# Altium PCB Jumper.PcbDoc (part 1 of 2)
Units mil, origin at the board's own origin, x right, y up, seen from the top; angles counter-clockwise.
Board outline 6325 x 3228 mil, 4 copper layers (Top Layer, GND, POWER, Bottom Layer), stack 61.145 mil thick; 115 components, 129 nets, 531 pads, 416 vias.
Unrouted connection lines stored in the file: 52.
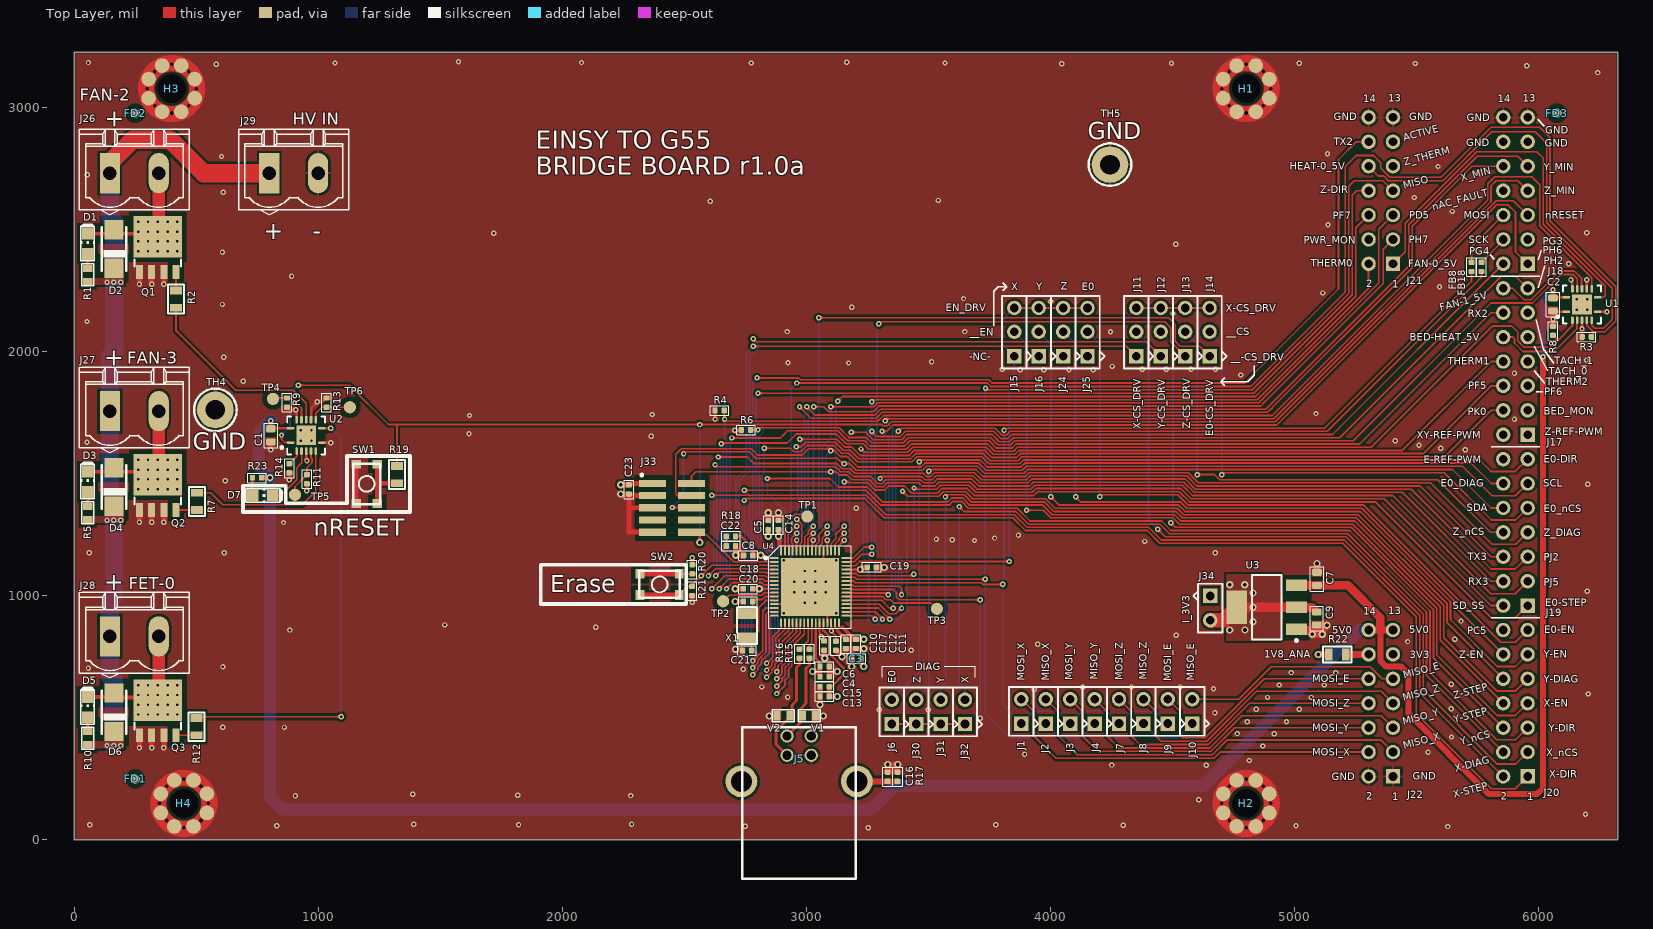
[diagram p0: Top Layer view]
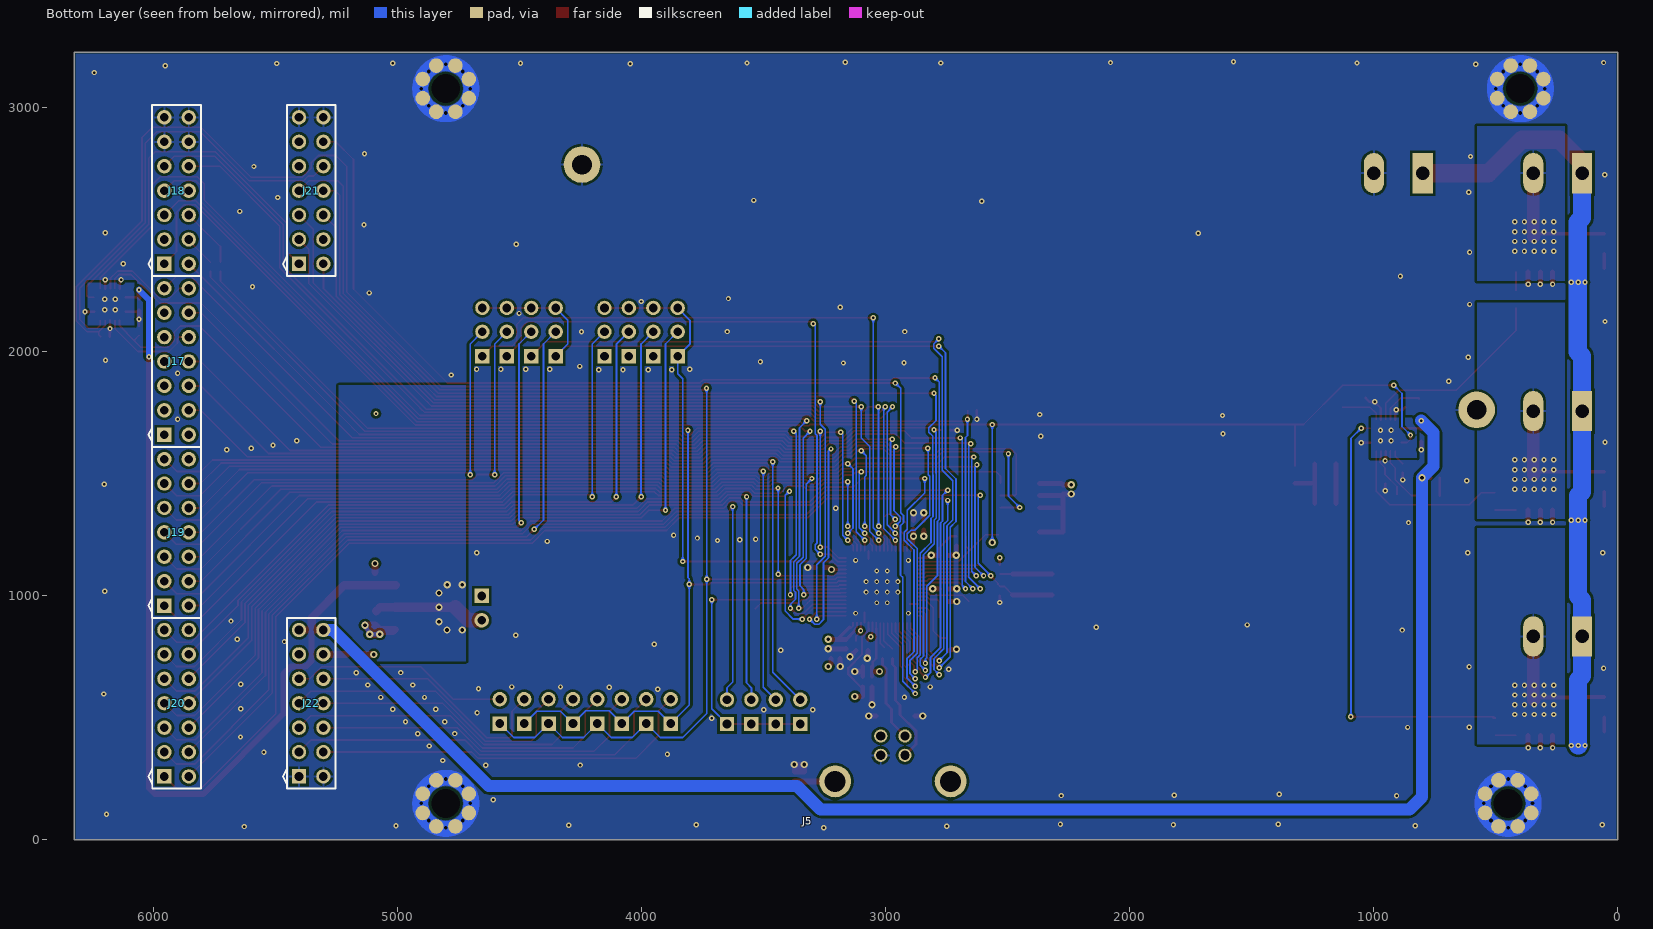
[diagram p1: Bottom Layer view, seen from below]
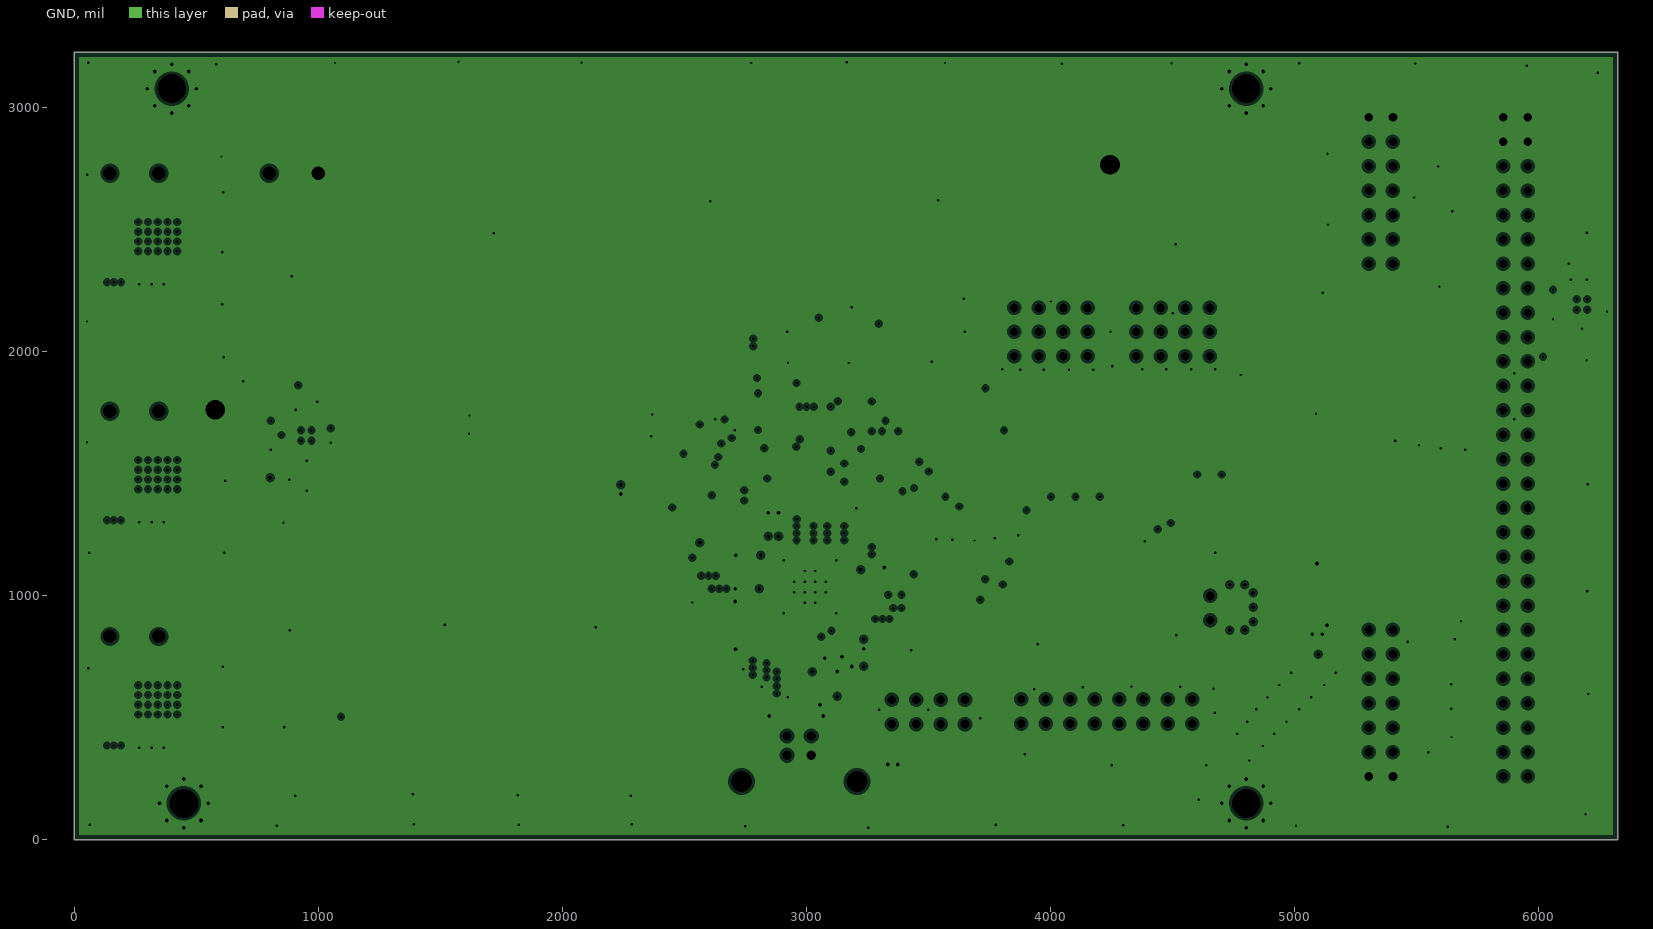
[diagram p2: GND, clearances drawn from the general rule]
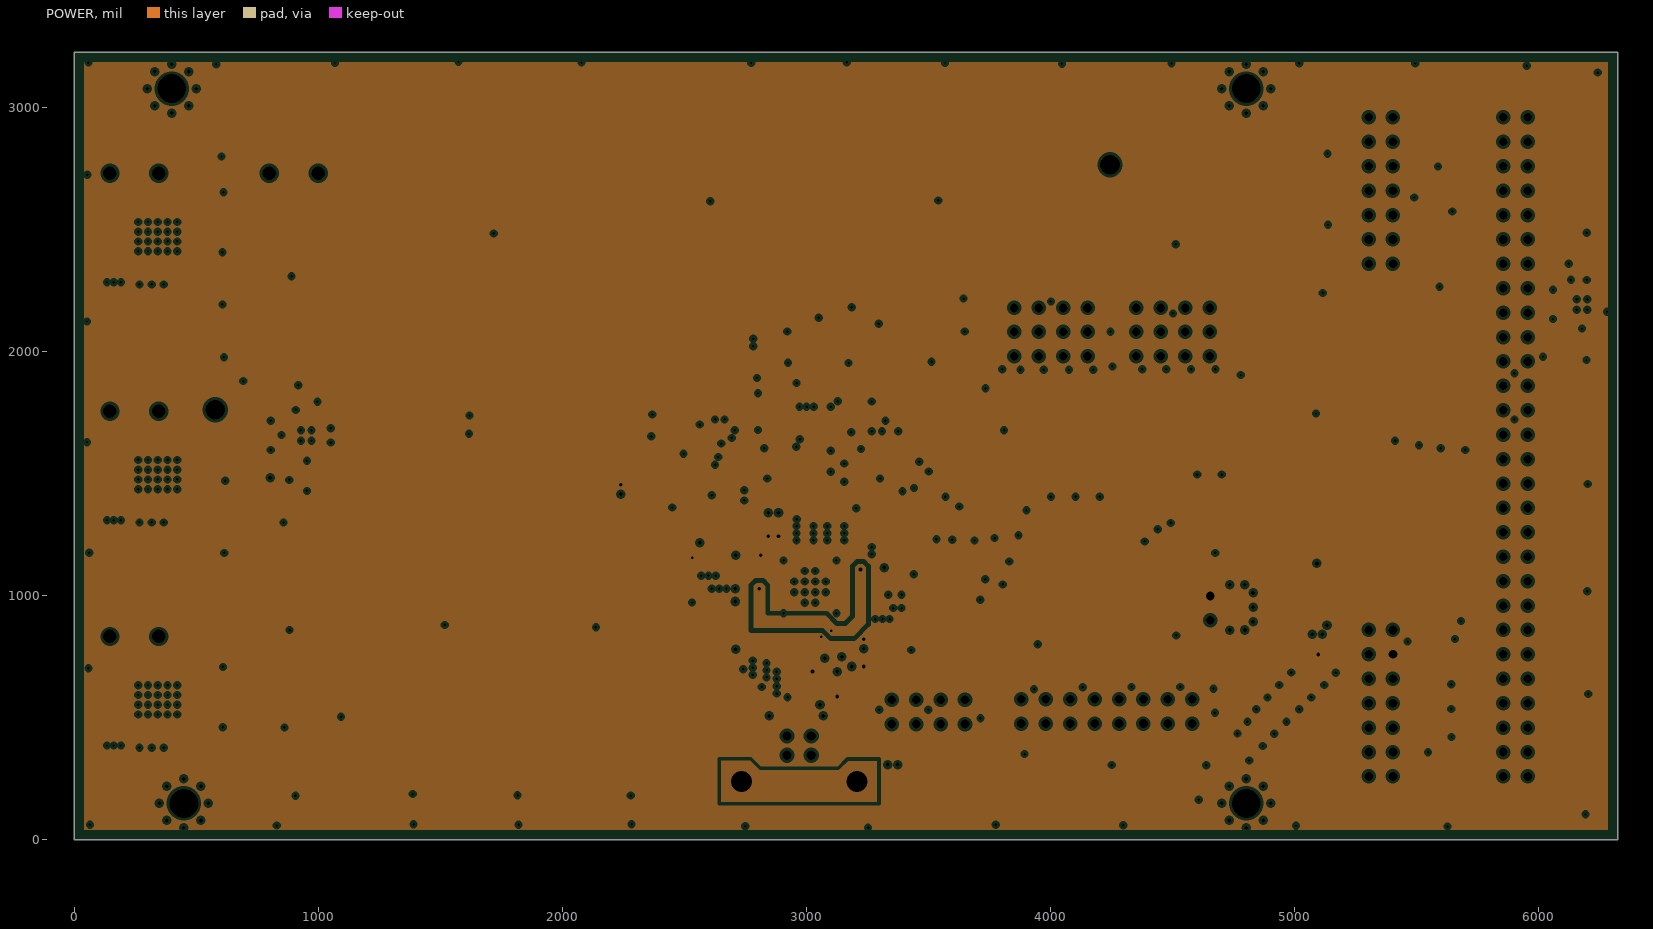
[diagram p3: POWER, clearances drawn from the general rule]

## Layer stack, top to bottom
Top Solder: solder mask 0.4, Solder Resist, Dk 3.5
Top Layer: signal copper 1.4
Dielectric 1: prepreg 7.48, Dk 4.2
GND: plane copper 1.417, net GND
Dielectric 3: core 40.551, Dk 4.2
POWER: plane copper 1.417, net 3V3
Dielectric 2: prepreg 7.48, Dk 4.2
Bottom Layer: signal copper 1.4
Bottom Solder: solder mask 0.4, Solder Resist, Dk 3.5

## Board outline
0,0 0,3228 6325,3228 6325,0

## Design rules (kind name [scope] priority, off if disabled: settings)
Clearance Fiducials [All] p1: gap=6 ignorepadtopadclearanceinfootprint=FALSE except(10: Arc-Poly Track-Poly THPad-Poly Via-Poly Fill-Poly Poly-Poly Poly-Region Poly-Hole; 20: SMDPad-Poly)
Clearance [All] p2: gap=6 ignorepadtopadclearanceinfootprint=FALSE except(10: Arc-Poly Track-Poly SMDPad-Poly THPad-Poly Via-Poly Fill-Poly Poly-Poly Poly-Region Poly-Hole)
ComponentClearance "Connector Interferance" [InComponentClass('Einsy Bot TH Conn') or InComponentClass('Top Jumpers') or InComponent('TH1')] p1: gap=-1 collisioncheckmode=3 verticalgap=100000 showdistances=FALSE
ComponentClearance [All] p2: gap=10 collisioncheckmode=3 verticalgap=10 showdistances=FALSE
HoleSize [All] p1: absolutevalues=TRUE maxlimit=250 minlimit=1 maxpercent=80.000 minpercent=20.000
MinimumSolderMaskSliver [All] p1: minsoldermaskwidth=3.8
PasteMaskExpansion [All] p1: expansion=-1
PlaneClearance [All] p1: clearance=12
PlaneConnect [All] p1: pad.planeconnectstyle=Relief pad.reliefexpansion=12 pad.reliefentries=4 pad.reliefconductorwidth=10 pad.reliefairgap=10 via.planeconnectstyle=Direct via.reliefexpansion=12 via.reliefentries=4 via.reliefconductorwidth=10 via.reliefairgap=10
PolygonConnect [All] p1: thpad.connectstyle=Relief thpad.reliefconductorwidth=10 thpad.reliefentries=4 thpad.polygonreliefangle="90 Angle" thpad.airgapwidth=10 smdpad.connectstyle=Direct smdpad.reliefconductorwidth=10 smdpad.reliefentries=4 smdpad.polygonreliefangle="90 Angle" smdpad.airgapwidth=10 via.connectstyle=Direct via.reliefconductorwidth=10 via.reliefentries=4 via.polygonreliefangle="90 Angle" via.airgapwidth=10
RoutingVias [All] p1: holewidth=10 width=22 viastyle="Through Hole" minholewidth=10 minwidth=22 maxholewidth=15 maxwidth=30
SilkToSilkClearance [All] p1 off: silktosilkclearance=10
SilkToSolderMaskClearance [IsPad] p1 off: minsilkscreentomaskgap=10 clearancetoexposedcopper=TRUE
SolderMaskExpansion "Via Barrel Relief" [IsVia] p1: expansion=1 soldermaskfromhole=TRUE
SolderMaskExpansion [All] p2: expansion=2
Width [All] p1: maxlimit=1000 minlimit=6 preferedwidth=8
22 further rules are at their usual default settings.

## Classes and differential pairs
component class Fiducials: FD1 FD2 FD3
component class "Large Connectors": J26 J27 J28 J29
component class "Einsy Bot TH Conn": J17 J18 J19 J20 J21 J22
component class "Bot Conn TH": J17 J18 J19 J20 J21 J22
component class "Top Jumpers": J1 J2 J3 J4 J6 J7 J8 J9 J10 J11 J12 J13 J14 J15 J16 J24 J25 J30 J31 J32

## Components (designator, comment, footprint, x,y, rotation, side; value= is the part's Value field where it differs from the comment)
C1 "100nF" C0603 806,1658 r90 top
C2 "100nF" C0603 6059,2194 r90 top
C3 "1uF" C0402#1 3205,743 r0 top
C4 "1uF" C0402#2 3075,669 r180 top
C5 "1uF" C0402#2 2844,1289.85 r90 top
C6 "100nF" C0402#2 3074.85,711 r0 top
C7 "4.7uF 6.3V 0603" C0603 5092,1070 r270 top value=4.7uF
C8 "100nF" C0402#2 2761.85,1166 r0 top
C9 "4.7uF 6.3V 0603" C0603 5091,907 r90 top value=4.7uF
C10 "100nF" C0402#2 3073,796.15 r90 top
C11 "100nF" C0402#2 3203.3,803.15 r90 top
C12 "100nF" C0402#2 3162,802.85 r90 top
C13 "1uF" C0402#2 3074.85,588 r0 top
C14 "100nF" C0402#2 2886,1290.15 r270 top
C15 "100nF" C0402#2 3075,628 r180 top
C16 "100nF" C0402#2 3333,259 r90 top
C17 "1uF" C0402#2 3121,795.85 r270 top
C18 "100nF" C0402#2 2760.85,1029 r0 top
C19 "100nF" C0402#2 3268.15,1117 r180 top
C20 "5.6pF" C0402#2 2761.15,977 r180 top
C21 "5.6pF" C0402#2 2757.15,776 r180 top
C22 "100nF" C0402#2 2691,1204 r0 top
C23 "100nF" C0402#2 2273,1436 r90 top
D1 "Red" LED2012120 56,2442 r90 top
D2 "SK310A-TP" SMA-SM 164,2421 r90 top value=-NA-
D3 "Red" LED2012120 56,1467 r90 top
D4 "SK310A-TP" SMA-SM 164,1446 r90 top value=-NA-
D5 "Red" LED2012120 56,544 r90 top
D6 "SK310A-TP" SMA-SM 164,523 r90 top value=-NA-
D7 "YEL" LED2012120 772,1411 r0 top
FB8 "120R" R0402 5725,2348 r270 top value=120Rfb
FB18 "120R" R0402 5766,2348 r270 top value=120Rfb
FD1 "FIDUCIAL" FIDUCIAL-1X2 250,250 r0 top
FD2 "FIDUCIAL" FIDUCIAL-1X2 250,2978 r0 top
FD3 "FIDUCIAL" FIDUCIAL-1X2 6075,2978 r0 top
H1 "Hole_DS" Wave_hole_3x7-doubleSided 4802,3078 r0 top
H2 "Hole_DS" Wave_hole_3x7-doubleSided 4802,150 r0 top
H3 "Hole_DS" Wave_hole_3x7-doubleSided 400,3078 r0 top
H4 "Hole_DS" Wave_hole_3x7-doubleSided 450,150 r0 top
J1 "Header 2x1" HDR2X1 3881,527.79 r90 top value=JMP
J2 "Header 2x1" HDR2X1 3981,527.79 r90 top value=JMP
J3 "Header 2x1" HDR2X1 4081,527.79 r90 top value=JMP
J4 "Header 2x1" HDR2X1 4181,527.79 r90 top value=JMP
J5 "USB-B TH R/A" PN61729_ALT 2970.22,240 r0 top locked value=USB-B
J6 "Header 2x1" HDR2X1 3350,525.79 r90 top value=JMP
J7 "Header 2x1" HDR2X1 4281,527.79 r90 top value=JMP
J8 "Header 2x1" HDR2X1 4381,527.79 r90 top value=JMP
J9 "Header 2x1" HDR2X1 4481,527.79 r90 top value=JMP
J10 "Header 2x1" HDR2X1 4581,527.79 r90 top value=JMP
J11 "Header 3x1" HDR3X1 4352,2082 r90 top value=JMP
J12 "Header 3x1" HDR3X1 4452,2082 r90 top value=JMP
J13 "Header 3x1" HDR3X1 4552,2082 r90 top value=JMP
J14 "Header 3x1" HDR3X1 4652,2082 r90 top value=JMP
J15 "Header 3x1" HDR3X1 3852,2082 r90 top value=JMP
J16 "Header 3x1" HDR3X1 3952,2082 r90 top value=JMP
J17 "HDR" HDR2X7_ALT_PINOUT 5904.95,1960.28 r90 bottom locked
J18 "HDR" HDR2X7_ALT_PINOUT 5904.95,2660.28 r90 bottom locked
J19 "HDR" HDR2X7_ALT_PINOUT 5904.95,1260.28 r90 bottom locked
J20 "HDR" HDR2X7_ALT_PINOUT 5904.76,560.28 r90 bottom locked
J21 "HDR" HDR2X7_ALT_PINOUT 5353.38,2660.28 r90 bottom locked
J22 "HDR" HDR2X7_ALT_PINOUT 5353.38,560.28 r90 bottom locked
J24 "Header 3x1" HDR3X1 4052,2082 r90 top value=JMP
J25 "Header 3x1" HDR3X1 4152,2082 r90 top value=JMP
J26 "0395311002" MSTBV2 247,2732 r0 top locked
J27 "0395311002" MSTBV2 247,1757 r0 top locked
J28 "0395311002" MSTBV2 247,834 r0 top locked
J29 "0395311002" MSTBV2 900,2732 r0 top locked
J30 "Header 2x1" HDR2X1 3450,525.79 r90 top value=JMP
J31 "Header 2x1" HDR2X1 3550,525.79 r90 top value=JMP
J32 "Header 2x1" HDR2X1 3650,525.79 r90 top value=JMP
J33 "0.05in 2-Row" FTSH-105-XX-X-DV 2450,1361 r90 top value=HDR10
J34 "Header 2x1" HDR2X1 4655,949 r270 top value=JMP
Q1 "PSMN1R8-40YLC" SOT669 343,2427 r0 top value=N-FET
Q2 "PSMN1R8-40YLC" SOT669 343,1452 r0 top value=N-FET
Q3 "PSMN1R8-40YLC" SOT669 343,529 r0 top value=N-FET
R1 "1.8K" R0603 56,2315 r270 top
R2 "22R" R0805 418,2216 r90 top
R3 "100K" R0402 6197,2061 r180 top
R4 "100K" R0402 2645,1760 r180 top
R5 "1.8K" R0603 56,1340 r270 top
R6 "100K" R0402 2753,1680 r180 top
R7 "22R" R0805 504,1387 r270 top
R8 "100K" R0402 6059,2086 r90 top
R9 "100K" R0402 872,1792 r270 top
R10 "1.8K" R0603 56,417 r270 top
R11 "100K" R0402 954,1478 r270 top
R12 "22R" R0805 502,464 r270 top
R13 "100K" R0402 1034,1791.9 r90 top
R14 "100K" R0402 882,1523 r270 top
R15 "0R" R0402 3013,763 r90 top
R16 "0R" R0402 2972,763 r90 top
R17 "1M" R0402 3374,259 r270 top
R18 "100K" R0402 2691,1244 r0 top
R19 "22R" R0805 1323,1497 r90 top
R20 "1K" R0402 2533,1109 r90 top
R21 "10K" R0402 2532,1020 r270 top
R22 "0R0" R0805 5175,760 r0 top
R23 "1K" R0402 750,1484 r180 top
SW1 "KMR741NG ULC LFS" "KMR 6 Series" 1199,1459 r90 top value=-NA-
SW2 "KMR741NG ULC LFS" "KMR 6 Series" 2399,1047 r0 top value=-NA-
TH4 "TH" TP_80_150 574,1962 r0 top
TH5 "TH" TP_80_150 4239,2967 r0 top
TP1 "#NAME?" TP-2 3004,1325 r90 top
TP2 "#NAME?" TP-2 2659,978 r90 top
TP3 "#NAME?" TP-2 3535,947 r90 top
TP4 "#NAME?" TP-2 815,1807 r90 top
TP5 "#NAME?" TP-2 905,1414 r90 top
TP6 "#NAME?" TP-2 1130,1773 r90 top
U1 "SN74AHCT125RGYR" QFN50P350X350X100_RGY_S-PVQFN-N14 6177.8,2193.53 r0 top locked value="Tri-State Buffer"
U2 "SN74AHCT125RGYR" QFN50P350X350X100_RGY_S-PVQFN-N14 951.2,1657.53 r0 top locked value="Tri-State Buffer"
U3 "3.3V 1A SOT223" SOT223_AZ1117 4886,953 r180 top value="3.3V LDO"
U4 "ATSAMG55J19A-MUT" QFN64_7.5x7.5mm 3015,1037 r0 top locked value=-NA-
V1 "5V" R0603 3011.75,508 r0 top
V2 "5V" R0603 2906,508 r180 top
X1 "32.768kHz" XTAL_32X15_2 2757,876.79 r270 top

## Footprints (in the part's own frame and the unit in brackets; to place one, negate y for a bottom-side part, rotate by r counter-clockwise, add the part's x,y. Pads: shape width x height; smd on the part's side, far side on the other; paste and mask are expansions set on the pad)
C0402#1 [mil]
  rrect40% 22x24 smd: 1(-18.7,0) 2(19,0)
  silkscreen extent -38,-19 38,20, body extent -20,-10 20,10, height 20
C0402#2 [mil]
  rrect40% 22x24 smd: 1(18.85,0) 2(-18.85,0)
  silkscreen extent -38,-20 38,19, body extent -20,-10 20,10, height 20
C0603 [mm]
  rrect40% 0.74x1 smd: 1(-0.68,0) 2(0.68,0)
  silkscreen extent -1.28,-0.7 1.28,0.7, body extent -0.8,-0.4 0.8,0.4, height 0.8
FIDUCIAL-1X2 [mil]
  rrect100% 40x40 smd paste-3897.64 mask+20: F(0,0)
  body extent -20,-20 20,20, height 1
FTSH-105-XX-X-DV [mm] "1.27mm pitch, 10 pin, terminal strip; vertical, SMT"
  rect 0.75x2.8 smd: 1(2.54,2.03) 2(2.54,-2.03) 3(1.27,2.03) 4(1.27,-2.03) 5(0,2.03) 6(0,-2.03) 7(-1.27,2.03) 8(-1.27,-2.03) 9(-2.54,2.03) 10(-2.54,-2.03)
  silkscreen extent 3.28,3.03 3.52,3.27
HDR2X1 [mm] "Connector; Header; 2X1 Position"
  rect 1.5x1.5 hole 0.9: 1(-1.29,0)
  round 1.5 hole 0.9: 2(1.25,0)
  silkscreen extent -2.56,-1.78 2.5,1.27, body extent -2.56,-1.27 2.5,1.27, height 6.35
HDR2X7_ALT_PINOUT [mm] "Connector; Header; 5x2 Position"
  rect 1.5x1.5 hole 0.9: 1(-7.62,1.27)
  round 1.5 hole 0.9: 2(-7.62,-1.27) 3(-5.08,1.27) 4(-5.08,-1.27) 5(-2.54,1.27) 6(-2.54,-1.27) 7(0,1.27) 8(0,-1.27) 9(2.54,1.27) 10(2.54,-1.27) 11(5.08,1.27) 12(5.08,-1.27) 13(7.62,1.27) 14(7.62,-1.27)
  silkscreen extent -8.89,-2.54 8.89,2.92, body extent -8.99,-2.64 8.99,2.64, height 6.35
HDR3X1 [mm] "Connector; Header; 2X1 Position"
  rect 1.5x1.5 hole 0.9: 1(-2.54,0)
  round 1.5 hole 0.9: 2(0,0) 3(2.48,0)
  silkscreen extent -3.81,-1.78 3.73,1.27, body extent -3.81,-1.27 3.73,1.27, height 6.35
"KMR 6 Series" [mm] "Tactile Switch SPST-NO Top Actuated Surface Mount"
  rect 0.9x1 smd: 1(-2.05,1.1) 2(2.05,1.1) 3(-2.05,-1.1) 4(2.05,-1.1)
  silkscreen extent -2.1,-1.4 2.1,1.4, body extent -2.1,-1.4 2.1,1.4, height 1.9
LED2012120 [mil]
  rect 48x48 smd: A(-41.34,0) C(42,0)
  silkscreen extent -69,-28 81,28, body extent -50,-25 50,25, height 28
MSTBV2 [mil]
  rect 82.5x165 hole 55: 1(-100,0)
  oval 82.5x165 hole 55: 2(100,0)
  silkscreen extent -225,-170 225,180, body extent -228,-153 228,183, height 394
PN61729_ALT [mil]
  round 54 hole 38: 1(50,186) 2(-49.21,186) 3(-49.21,107) 4(50,107)
  round 130.5 hole 87: 5(-236.22,0) 6(237,0)
  silkscreen extent -232,-400 233,221, body extent -237,-405 238,226, height 406
QFN50P350X350X100_RGY_S-PVQFN-N14 [mm] "QFN, 14-Leads, Body 3.50x3.50mm, Pitch 1.50mm/0.50mm, Thermal Pad 2.05x2.05mm, IPC High Density"
  oval 0.8x0.28 smd: 1(-1.631,-0.75) 7(1.631,-0.75) 8(1.631,0.75) 14(-1.631,0.75)
  oval 0.28x0.8 smd: 2(-1,-1.631) 3(-0.5,-1.631) 4(0,-1.631) 5(0.5,-1.631) 6(1,-1.631) 9(1,1.631) 10(0.5,1.631) 11(0,1.631) 12(-0.5,1.631) 13(-1,1.631)
  rect 2.05x2.05 smd paste-1.143: 15(0,0)
  silkscreen extent -2.66,-1.97 1.97,1.97, body extent -1.83,-1.83 1.83,1.83, height 1
QFN64_7.5x7.5mm [mm]
  oval 0.9x0.2 smd paste-0.025 mask+0.051: 1(-3.725,3) 2(-3.725,2.6) 3(-3.725,2.2) 4(-3.725,1.8) 5(-3.725,1.4) 6(-3.725,1) 7(-3.725,0.6) 8(-3.725,0.2) 9(-3.725,-0.2) 10(-3.725,-0.6) 11(-3.725,-1) 12(-3.725,-1.4) 13(-3.725,-1.8) 14(-3.725,-2.2) 15(-3.725,-2.6) 16(-3.725,-3) 33(3.725,-3) 34(3.725,-2.6) 35(3.725,-2.2) 36(3.725,-1.8) 37(3.725,-1.4) 38(3.725,-1) 39(3.725,-0.6) 40(3.725,-0.2) 41(3.725,0.2) 42(3.725,0.6) 43(3.725,1) 44(3.725,1.4) 45(3.725,1.8) 46(3.725,2.2) 47(3.725,2.6) 48(3.725,3)
  oval 0.2x0.9 smd paste-0.025 mask+0.051: 17(-3,-3.725) 18(-2.6,-3.725) 19(-2.2,-3.725) 20(-1.8,-3.725) 21(-1.4,-3.725) 22(-1,-3.725) 23(-0.6,-3.725) 24(-0.2,-3.725) 25(0.2,-3.725) 26(0.6,-3.725) 27(1,-3.725) 28(1.4,-3.725) 29(1.8,-3.725) 30(2.2,-3.725) 31(2.6,-3.725) 32(3,-3.725) 49(3,3.725) 50(2.6,3.725) 51(2.2,3.725) 52(1.8,3.725) 53(1.4,3.725) 54(1,3.725) 55(0.6,3.725) 56(0.2,3.725) 57(-0.2,3.725) 58(-0.6,3.725) 59(-1,3.725) 60(-1.4,3.725) 61(-1.8,3.725) 62(-2.2,3.725) 63(-2.6,3.725) 64(-3,3.725)
  rect 6.02x6.02 smd paste-3.175 mask+0.051: 65(0,0)
  silkscreen extent -4.74,-4.29 4.29,4.29, body extent -3.75,-3.75 3.75,3.75, height 0.9
R0402 [mil]
  rrect40% 22x24 smd: 1(-18.9,0) 2(19,0)
  silkscreen extent -38,-19 38,20, body extent -20,-10 20,10, height 14
R0603 [mil]
  rect 29x39 smd: 1(-26.75,0) 2(26.75,0)
  silkscreen extent -45,-25 45,25, body extent -34,-19 34,19, height 22
R0805 [mm]
  rect 0.8x1.25 smd mask+0.051: 1(-0.9,0) 2(0.9,0)
  silkscreen extent -1.5,-0.82 1.5,0.82, body extent -1.05,-0.67 1.05,0.67, height 0.6
SMA-SM [mil]
  rect 79x79 smd: A(79,0) K(-78.74,0)
  round 25 on Top Overlay: ""(-107.28,56.1)
  silkscreen extent -89,-49 89,50, body extent -105,-54 105,55, height 116
SOT223_AZ1117 [mm] "Made for Diodes Inc AZ1117 Vreg"
  rect 2.15x1.2 smd: 1(-3.1,2.3) 2(-3.1,0) 3(-3.1,-2.3)
  rect 2.15x3.5 smd: TAB(3.1,0)
  silkscreen extent -3.22,-3.35 1.55,3.57, body extent -3.5,-3.35 3.5,3.35, height 1.8
SOT669 [mm]
  rect 0.711x1.422 smd: 1(-1.905,-2.55) 2(-0.635,-2.55) 3(0.635,-2.55) 4(1.905,-2.55)
  rect 5.004x4.318 smd paste-2.6: TAB(0,1.118)
  rect 2.26x1.91 on Top Paste: ""(-1.351,-0.036) ""(-1.351,2.315) ""(1.351,-0.037) ""(1.351,2.314)
  silkscreen extent -2.4,-1.95 2.41,-1.22, body extent -2.44,-3.05 2.46,3.25, height 1.1
TP-2 [mil]
  round 50 smd paste-78.74: 1(0,0)
  body extent -25,-25 25,25, height 1
TP_80_150 [mil]
  round 150 hole 80: 1(5,-200)
  silkscreen extent -82,-287 92,-113
Wave_hole_3x7-doubleSided [mil]
  round 0 hole 15 paste-20 mask-20: 1(-100,0) 1(-70,-70) 1(-70,70) 1(0,-100) 1(0,100) 1(70,-70) 1(70,70) 1(100,0)
  round 60 smd paste-5 mask+0: 1(-94.49,-39.37) 1(-94.49,39.37) 1(-39.37,-94.49) 1(-39.37,94.49) 1(39.37,-94.49) 1(39.37,94.49) 1(94.49,-39.37) 1(94.49,39.37)
  round 60 smd far side paste-5 mask+0: 1(-94.49,-39.37) 1(-94.49,39.37) 1(-39.37,-94.49) 1(-39.37,94.49) 1(39.37,-94.49) 1(39.37,94.49) 1(94.49,-39.37) 1(94.49,39.37)
  round 0 hole 118.11 unplated paste+0 mask-112: ""(0,0)
  Top Layer lines w64.96: -74.25,-74.25 cw(c0,0) 105,0 cw(c0,0) 19.9,-103.1 cw(c0,0) -74.25,-74.25
  Bottom Layer lines w64.96: -74.25,74.25 cw(c0,0) 105,0 cw(c0,0) 74.25,-74.25 cw(c0,0) -74.25,74.25
  body extent -105,-105 105,105
XTAL_32X15_2 [mm]
  rect 1.1x1.9 smd: 1(-1.25,0) 2(1.25,0)
  silkscreen extent -1.9,-1.05 1.9,1.05, body extent -1.6,-0.75 1.6,0.75, height 0.9

## Part data
C1 C2: library part "100nF 0603 50V X7R", "CAP CER 0603 100nF 50V 10% X7R", Manufacturer=Kemet, MANUFACTURER #=C0603C104K5RACTU, TOLERANCE=10%, DISTRIBUTOR=Digikey, DISTRIBUTOR #=399-5089-2-ND, EE_SPEC=50V, PART="100nF 50V X7R 0603", PART DESCRIPTION="0.10µF ±10% 50V Ceramic Capacitor X7R 0603 (1608 Metric)"
C3 C4 C5 C13 C17: library part "1uF 0402 6.3V X5R", "CAP CER 0402 1uF 6.3V 10% X5R", Manufacturer=Murata, MANUFACTURER #=GRM155R60J105KE19D, TOLERANCE=10%, DISTRIBUTOR=Digikey, DISTRIBUTOR #=490-1320-2-ND, EE_SPEC=6.3V, PART="1uF 6.3V X5R 0402", PART DESCRIPTION="1µF ±10% 6.3V Ceramic Capacitor X5R 0402 (1005 Metric)"
C6 C8 C10 C11 C12 C14 C15 C16 C18 C19 C22 C23: library part "100nF 0402 16V X7R", "CAP CER 0402 100nF 16V 10% X7R", Manufacturer=Murata, MANUFACTURER #=GRM155R71C104KA88D, TOLERANCE=10%, DISTRIBUTOR=Digikey, DISTRIBUTOR #=490-3261-2-ND, EE_SPEC=16V, PART="0.1uF 16V X7R 0402", PART DESCRIPTION="0.10µF ±10% 16V Ceramic Capacitor X7R 0402 (1005 Metric)"
C7 C9: library part "4.7uF 0603 6.3V X7R", "CAP CER 4.7UF 6.3V X7R 0603", Manufacturer=Samsung, MANUFACTURER #=CL10B475KQ8NQNC, TOLERANCE=10%, DISTRIBUTOR=Digikey, DISTRIBUTOR #=1276-2087-2-ND, EE_SPEC=6.3V, PART=4.7uF, PART DESCRIPTION="4.7µF ±10% 6.3V Ceramic Capacitor X7R 0603 (1608 Metric)"
C20 C21: library part "5.6pF 50V 0402 C0G", "CAP CER 5.6PF 50V C0G/NP0 0402", Manufacturer=Murata, MANUFACTURER #=GRM1555C1H5R6CA01D, TOLERANCE=+/-0.25pF, DISTRIBUTOR=Digikey, DISTRIBUTOR #=490-6250-2-ND, EE_SPEC=50V, PART="5.6pF 50V 0402 C0G", PART DESCRIPTION="5.6pF ±0.25pF 50V Ceramic Capacitor C0G, NP0 0402 (1005 Metric)"
D1 D3 D5: library part 5988110107F, "LED 0805 Red", Manufacturer=Dialight, TOLERANCE=-NA-, DISTRIBUTOR=Digikey, DISTRIBUTOR #=350-2038-2-ND, EE_SPEC=Vf=2.2V, MANUFACTURER #=5988110107F, PART="LED Red 0805", PART DESCRIPTION="Red 635nm LED Indication - Discrete 2.2V 0805 (2012 Metric)"
D2 D4 D6: library part SK310A, "DIODE Schottky 3A SMA", Manufacturer=MCC, TOLERANCE=-NA-, DISTRIBUTOR=Digikey, DISTRIBUTOR #=SK310A-TPTR-ND, EE_SPEC="100V 3A", MANUFACTURER #=SK310A, PART="Schottky Diode 100V 3A", PART DESCRIPTION="Diode Schottky 100V 3A Surface Mount DO-214AC (HSMA)"
D7: library part 5988140107F, "LED 0805 Yellow", Manufacturer=Dialight, TOLERANCE=-NA-, DISTRIBUTOR=Digikey, DISTRIBUTOR #=350-2041-2-ND, EE_SPEC=Vf=2V, MANUFACTURER #=5988140107F, PART="LED Yellow 0805", PART DESCRIPTION="Yellow 593nm LED Indication - Discrete 2V 0805 (2012 Metric)"
FB8 FB18: library part "FERRITE 120R 1A 0402", "FERRITE BEAD 120 OHM 0402 1LN", Manufacturer="Taiyo Yuden", MANUFACTURER #=BKP1005HS121-T, TOLERANCE=-NA-, DISTRIBUTOR=Digikey, DISTRIBUTOR #=587-1921-2-ND, EE_SPEC=1A, PART="FERRITE 120R 1A 0402", PART DESCRIPTION="FERRITE BEAD 120 OHM 0402 1LN"
FD1 FD2 FD3: MANUFACTURER #=NOTAPART-Fiducial
H1 H2 H3 H4: MANUFACTURER #=NOTAPART-Hole
J1 J2 J3 J4 J6 J7 J8 J9 J10 J30 J31 J32 J34: "Header 2Pin 1Row T-Hole", Manufacturer=Multicomp, MANUFACTURER #=2211S-02G, TOLERANCE=-NA-, DISTRIBUTOR=Newark, DISTRIBUTOR #=08N6744, EE_SPEC=-NA-, PART="CONN 2Pin 1Row 0.1\"", PART DESCRIPTION="MULTICOMP  2211S-02G  Board-To-Board Connector, 2.54 mm, 2 Contacts, Header, 2211S Series, Through Hole, 1 Rows"
J5: "USB connector B PTH", Manufacturer=FCI, MANUFACTURER #=61729-0010BLF, TOLERANCE=NA, DISTRIBUTOR=Digi-Key, DISTRIBUTOR #=609-1039-ND, EE_SPEC="USB-B T-Hole R/A", PART=USB-B, PART DESCRIPTION="USB - B USB 2.0 Receptacle Connector 4 Position Through Hole, Right Angle"
J11 J12 J13 J14 J15 J16 J24 J25: library part "Header 3x1 Male Pin", "Header 3Pin 1Row T-Hole", Manufacturer=Multicomp, MANUFACTURER #=2211S-03G, TOLERANCE=-NA-, DISTRIBUTOR=Newark, DISTRIBUTOR #=08N6745, EE_SPEC=-NA-, PART="CONN 3Pin 1Row 0.1\"", PART DESCRIPTION="MULTICOMP  2211S-03G  Board-To-Board Connector, 2.54 mm, 3 Contacts, Header, 2211S Series, Through Hole, 1 Rows"
J17 J18 J19 J20 J21 J22: library part "Header 2X7 Male Pin", "CONN HEADER .100\" DUAL STR 14POS", Manufacturer=Sullins, MANUFACTURER #=PRPC007DAAN-RC, TOLERANCE=-NA-, DISTRIBUTOR=Newark, DISTRIBUTOR #=S2011EC-07-ND, EE_SPEC=-NA-, PART DESCRIPTION="14 Positions Header, Breakaway Connector 0.100\" (2.54mm) Through Hole Gold"
J26 J27 J28 J29: "Conn - 5.08mm Pitch Fixed", Manufacturer=Molex, TOLERANCE=NA, DISTRIBUTOR=Digi-Key, DISTRIBUTOR #=WM7837-ND, EE_SPEC="300V 15A 0.2\"", MANUFACTURER #=0395311002, PART=2POS, PART DESCRIPTION="2 Position Terminal Block Header, Male Pins, Shrouded (4 Side) 0.200\" (5.08mm) Vertical Through Hole"
J33: library part "ARM Cortex JTAG-DEBUG Header", "20021121-00010C4LF", Manufacturer="Amphenol FCI", TOLERANCE=-NA-, DISTRIBUTOR=Digikey, DISTRIBUTOR #=609-3695-2-ND, DNI=DNI, EE_SPEC=-NA-, MANUFACTURER #=20021121-00010C4LF, PART="10 Pin Conn 2Row SMT", PART DESCRIPTION="10 Positions Header, Unshrouded Connector 0.050\" (1.27mm) Surface Mount Gold"
Q1 Q2 Q3: "MOSFET N-CH 40V 100A LFPAK", Manufacturer=Nexperia, MANUFACTURER #=PSMN1R8-40YLC,115, TOLERANCE=-NA-, DISTRIBUTOR=Digikey, DISTRIBUTOR #=1727-1052-2-ND, EE_SPEC="40V 100A 1.8mOhm", PART=N-FET, PART DESCRIPTION="N-Channel 40V 100A (Tc) 272W (Tc) Surface Mount LFPAK56, Power-SO8"
R1 R5 R10: library part "1.8k 5% 0603", "RES 0603 1.8K 100mW 5%", Manufacturer=Yageo, MANUFACTURER #=RC0603JR-071K8L, TOLERANCE=5%, DISTRIBUTOR=Digikey, DISTRIBUTOR #=311-1.8KGRTR-ND, EE_SPEC=1/10W, PART="1.8k 5% 0603", PART DESCRIPTION="1.8k Ohm ±5% 0.1W, 1/10W Chip Resistor 0603 (1608 Metric) Moisture Resistant Thick Film"
R2 R7 R12 R19: library part "22R 1% 0805", "RES SMD 22 OHM 1% 1/8W 0805", Manufacturer=Yageo, MANUFACTURER #=RC0805FR-0722RL, TOLERANCE="+/- 1%", DISTRIBUTOR=Digi-Key, DISTRIBUTOR #=311-22.0CRTR-ND, EE_SPEC="22R 1% 0805", PART="RES SMD 22 OHM 1% 1/8W 0805", PART DESCRIPTION="±1% 0.125W, 1/8W Chip Resistor 0805 (2012 Metric) Moisture Resistant Thick Film"
R3 R4 R6 R8 R9 R11 R13 R14 R18: library part "100k 1% 0402", "RES SMD 100K OHM 1% 1/16W 0402", Manufacturer=Samsung, MANUFACTURER #=RC1005F104CS, TOLERANCE=1%, DISTRIBUTOR=Digikey, DISTRIBUTOR #=1276-3432-1-ND, EE_SPEC=1/16W, PART="100k 1% 0402", PART DESCRIPTION="100k Ohm ±1% 0.063W, 1/16W Chip Resistor 0402 (1005 Metric) Moisture Resistant Thick Film"
R15 R16: library part "0R 0402", "RES SMD 0.0OHM JUMPER 1/10W 0402", Manufacturer=Panasonic, MANUFACTURER2 #=RC0402JR-070RL, MANUFACTURER #=ERJ-2GE0R00X, TOLERANCE=1%, DISTRIBUTOR=Digikey, DISTRIBUTOR #=P0.0JTR-ND, EE_SPEC=1/10W, PART=0R, PART DESCRIPTION="0.0 Ohm Jumper 0.1W, 1/10W Chip Resistor 0402 (1005 Metric) Automotive AEC-Q200 Thick Film"
R17: library part "1M 5% 0402", "RES 0402 1M 100mW 5%", Manufacturer=Panasonic, MANUFACTURER #=ERJ2GEJ105X, TOLERANCE=5%, DISTRIBUTOR=Digikey, DISTRIBUTOR #=P1.0MJTR-ND, EE_SPEC=1/10W, PART="1M 5% 0402", PART DESCRIPTION="1M Ohm ±5% 0.1W, 1/10W Chip Resistor 0402 (1005 Metric) Automotive AEC-Q200 Thick Film"
R20 R23: library part RC0402FR-071KL, "RES SMD 1K OHM 1% 1/16W 0402", Manufacturer=Yageo, TOLERANCE="+/- 1%", DISTRIBUTOR=Digi-Key, DISTRIBUTOR #=311-1.00KLRTR-ND, EE_SPEC="1k 1% 0402", MANUFACTURER #=RC0402FR-071KL, PART=1k, PART DESCRIPTION="1k Ohm ±1% 0.063W, 1/16W Chip Resistor 0402 (1005 Metric) Moisture Resistant Thick Film"
R21: library part "10k 1% 0402", "RES SMD 10K OHM 1% 1/16W 0402", Manufacturer=Yageo, MANUFACTURER #=RC0402FR-0710KP, TOLERANCE=1%, DISTRIBUTOR=Digikey, DISTRIBUTOR #=YAG1249TR-ND, EE_SPEC=1/16W, PART="10k 1% 0402", PART DESCRIPTION="10k Ohm ±1% 0.063W, 1/16W Chip Resistor 0402 (1005 Metric) Moisture Resistant Thick Film"
R22: library part "0R0 1% 0805", "RES 0.0 OHM 1/8W JUMP 0805 SMD", Manufacturer=STACKPOLE, MANUFACTURER #=RMCF0805ZT0R00, TOLERANCE=1%, DISTRIBUTOR=Digi-Key, DISTRIBUTOR #=RMCF0805ZT0R00CT-ND, EE_SPEC=0.125W, PART=0R0, PART DESCRIPTION="0 Ohms Jumper 0.125W, 1/8W Chip Resistor 0805 (2012 Metric) Automotive AEC-Q200 Thick Film"
SW1 SW2: "SWITCH TACTILE SPST-NO 0.05A 12V", Manufacturer=C&K, TOLERANCE=-NA-, DISTRIBUTOR=Digikey, DISTRIBUTOR #=CKN10688TR-ND, EE_SPEC="32V 50mA", MANUFACTURER #="KMR741NG ULC LFS", PART="Tactile Pushbutton SMT", PART DESCRIPTION="Tactile Switch SPST-NO Top Actuated Surface Mount"
TH4 TH5: library part "TH 85mil", "THRUHOLE 85mil", COST=NA, PART=THRUHOLE
TP1 TP2 TP3 TP4 TP5 TP6: library part "Testpoint SMT", "Testpoint SMT", MANUFACTURER #=NOTAPART-Testpoint
U1 U2: library part SN74AHCT125, "Quadruple Bus Buffer Gates With 3-State Outputs 14-VQFN -40 to 125", Manufacturer="Texas Instruments", TOLERANCE=-NA-, DISTRIBUTOR=Digikey, DISTRIBUTOR #=296-13910-2-ND, EE_SPEC="5V 8mA", MANUFACTURER #=SN74AHCT125RGYR, PART="IC BUS BUFFER TRI-ST QD 14VQFN", PART DESCRIPTION="Buffer, Non-Inverting 4 Element 1 Bit per Element Push-Pull Output 14-VQFN (3.5x3.5)"
U3: library part "LDO 3.3V 1A SOT223", "IC REG LDO 3.3V 1A SOT223", Manufacturer="Diodes Inc", MANUFACTURER #=AZ1117EH-3.3TRG1, TOLERANCE=-NA-, DISTRIBUTOR=Digikey, DISTRIBUTOR #=AZ1117EH-3.3TRG1DITR-ND, EE_SPEC=1A, PART="IC REG LDO 3.3V 1A SOT223", PART DESCRIPTION="Linear Voltage Regulator IC Positive Fixed Output 3.3V 1A SOT-223"
U4: "IC MCU 32BIT 512KB FLASH 64QFN", Manufacturer=Atmel, TOLERANCE=-NA-, DISTRIBUTOR=Digikey, DISTRIBUTOR #=ATSAMG55J19A-MUT-ND, EE_SPEC=3.3V, MANUFACTURER #=ATSAMG55J19A-MUT, PART=ATSAMG55J19A-MUT, PART DESCRIPTION="ARM® Cortex®-M4 SAM G55 Microcontroller IC 32-Bit 120MHz 512KB (512K x 8) FLASH 64-QFN (7.5x7.5)"
V1 V2: library part "VAR 5V 0603", "VAR 0603 5V 0.5Pf", Manufacturer=YAGEO, MANUFACTURER #=CG0603MLC-05E, TOLERANCE=NA, DISTRIBUTOR=Digi-Key, DISTRIBUTOR #=CG0603MLC-05ETR-ND, EE_SPEC="5VDC 0.5pF", PART=5VDC, PART DESCRIPTION="VARISTOR 0603"
X1: library part "32.768kHz 20ppm 7pF 50k_ESR", "CRYSTAL 32.768KHZ 7PF SMD", Manufacturer=ECS, MANUFACTURER #=ECS-.327-7-34R-TR, TOLERANCE=20ppm, DISTRIBUTOR=Digikey, DISTRIBUTOR #=XC2126TR-ND, EE_SPEC="32.768kHz 20ppm 7pF 50k_ESR", PART=32.768kHz, PART DESCRIPTION="32.768kHz ±20ppm Crystal 7pF 50 kOhm -40°C ~ 85°C Surface Mount 2-SMD, No Lead"

## Free pads (board coordinates)
  round 20 on Mech16 mask+2: ""(472,1014) ""(472,1937) ""(5403.38,260.28) ""(5403.38,2360.28) ""(5954.76,260.28) ""(5954.95,960.28) ""(5954.95,1660.28) ""(5954.95,2360.28)
  round 60 on Mech16: ""(4952,212)

## Via types
v1: diameter 22, hole 10, Top Layer to Bottom Layer, 356 vias
v2: diameter 30, hole 15, Top Layer to Bottom Layer, 42 vias
v3: diameter 20, hole 10, Top Layer to Bottom Layer, 16 vias
v4: diameter 22, hole 10, Top Layer to Bottom Layer, tented both sides, 2 vias

## Nets (pads, with @x,y where several pads share a name; then routed paths per layer and width w, separated by ;. In a path a pad name is that pad's centre, name@x,y a point inside that pad or via, vN(x,y) a via of type N, cw(c..) or ccw(c..) an arc to the next point about the centre after c; other vN are vias at no path point)
1V8: J22.12 R22.2 | length 93.1
  Top Layer w30: R22.2@5210.43,760 5303.09,760 J22.12@5303.38,760.28
3V3: C3.2 C4.1 C5.2 C6.2 C8.1 C10.1 C11.1 C12.1 C13.1 C14.1 C15.2 C23.1 J22.11 J33.1 J34.1 R18.2 R20.2 R22.1 U4.1 U4.26 U4.27 U4.28 U4.31 U4.32 U4.64 | length 1602.8
  Top Layer w7.87: 2843,1157 2844.89,1155.11 U4.1@2868.35,1155.11 ; v2@2890,1240 2896.89,1233.11 U4.64@2896.89,1183.65 ; 3038,865 3038.62,865.62 U4.26@3038.62,890.35 ; U4.27@3054.37,890.35 3054.37,871.91 3054.06,871.6 3054.06,847.37 3056,845.43 ; 3070.12,861.12 U4.28@3070.12,890.35 ; U4.31@3117.36,890.35 3117.36,874.23 3124.91,866.68 3124.91,864.09 3128.47,860.53 3128.47,855.23 ; U4.32@3133.11,890.35 3133.11,877.11 3141,869.22 3145.22,869.22
  Top Layer w10: R20.2@2533,1128 v1(2533,1156) ; R18.2@2710,1244 2734,1244 2780.7,1197.3 C8.1@2780.7,1166 ; 3038,865 3038,744.86 3053,729.86 3053,714 C6.2@3056,711 ; 3056,845.43 3063,837.43 3073,827.43 C10.1@3073,815 ; 3070,865 3070,858 3097,831 3097,761 3153,705 3153,678 3103,628 C15.2@3094,628
  Top Layer w12: v2(2813,1166) 2822,1157 2843,1157
  Top Layer w15: C6.2@3056,711 3056,669.15 C4.1@3056.15,669 ; 3128.47,855.23 C12.1@3162,821.7 ; 3148,872 3198.3,821.7 C11.1@3203,821.7
  Top Layer w20: v2(2239.85,1454.85) C23.1@2273,1454.85 2279.15,1461 J33.1@2370.08,1461 ; C8.1@2780.7,1166 v2(2813,1166) ; v2(2844,1243.7) C5.2@2844,1271 ; C14.1@2886,1271.3 v2(2886,1244) 2890,1240 2890,1213 ; v2(3025,690) 3053,690 ; C15.2@3094,628 3093.7,627.7 C13.1@3093.7,588 v2(3126,588) ; C12.1@3162,821.7 C11.1@3198.3,821.7 ; C11.1@3203,821.7 C11.1@3203.3,822 v2(3235,822) ; C3.2@3224,743 3224,722 v2(3235,711)
  Top Layer w30: v2(5097,760) R22.1@5139.57,760
  other v4: 3061,832
5V0: C1.2 C2.2 C7.2 J22.13 J22.14 R23.1 U1.14 U2.14 U3.3 | length 10377.1
  Top Layer w10: C1.2@806,1684.77 808.28,1687.06 U2.14@887,1687.06 ; C2.2@6059,2220.77 6061.28,2223.06 U1.14@6113.6,2223.06
  Top Layer w20: R23.1@768.9,1484 v2(803,1484) ; C1.2@806,1684.77 v1(806,1718) ; C2.2@6059,2220.77 v1(6059,2254)
  Top Layer w25: 5352,860.28 5353,859.28 5353,733 5376,710 5438,710 5467,681 5467,517 5796,188 5993,188 6018,213 v1@6018,1979
  Top Layer w30: J22.14@5303.38,860.28 5352,860.28 J22.13@5403.38,860.28
  Top Layer w35: U3.3@5008.05,1043.55 5218.45,1043.55 5352,910 5352,860.28
  Bottom Layer w25: v1(6018,1980) 6018,2213 v1(6059,2254)
  Bottom Layer w50: v1(806,1718) 756,1668 756,1531 v2(803,1484) 803,176 854,125 3266.73,125 3362.73,221 4626,221 5265.28,860.28 J22.14@5303.38,860.28
12V: D2.K D4.K D6.K J26.1 J27.1 J28.1 J29.1 R1.2 R5.2 R10.2 | length 3173.1
  Top Layer w75: J26.1@147,2732 147,2775 241,2869 393,2869 530,2732 J29.1@800,2732
  Bottom Layer w75: J26.1@147,2732 147,2549 165,2531 165,2000 147,1982 J27.1@147,1757 147,1427 164,1410 164,1000 147,983 J28.1@147,834 147,672 164,655 164,388 v1(163,387)
  other v1: 135,387 192,387 135,1310 163,1310 192,1310 135,2285 163,2285 192,2285
ACTIVE: J21.11
BED-HEAT: R8.1 U1.2 U4.6 | length 4806.3
  Top Layer w7: v1(2613,1029) 2667,1083 2830,1083 2836.63,1076.37 U4.6@2868.35,1076.37 ; v1(2651,1624) 2653,1626 2921,1626 2958,1663 3123,1663 3163,1623 3233,1623 3255,1601 3409,1601 3430,1622 3743,1622 3772,1593 3849,1593 3865,1609 5315,1609 5812,2106 5889,2106 5914,2081 5914,2045 5940,2019 6051,2019 6080,2048 ; R8.1@6059,2067.1 6078.1,2048 6080,2048 ; U1.2@6138.43,2129.33 6138.43,2106.43 6080,2048
  Bottom Layer w7: v1(2613,1029) 2660,1076 2660,1615 v1(2651,1624)
BED-HEAT_5V: J17.10 U1.3 | length 411.5
  Top Layer w7: J17.10@5854.95,2060.28 5894.72,2060.28 5901,2054 5901,2036 5936,2001 6064,2001 6157,2094 6157,2128.21 U1.3@6158.11,2129.33
BED_MON: J17.3
DM: J5.2 R15.1 V1.1 | length 381.2
  Top Layer w12: J5.2@2921.01,426 2976,480.99 ; V1.1@2976,506 2976,480.99 ; R15.1@3013,744.1 3013,717 2998,702 2998,559 2976,537 2976,480.99
DP: J5.3 R16.1 V2.1 | length 456.3
  Top Layer w12: J5.3@2921.01,347 2875,393.01 2875,446 2941,512 2941,552 2960,571 2960,707 2972,719 R16.1@2972,744.1
E0-CS_DRV: J14.1 U4.57 | length 2680
  Top Layer w7: U4.57@3007.13,1183.65 3007.13,1235.13 v1(3029,1257) ; v1(3051,2139) 4484,2139 4511,2112 4511,2043 4531,2023 4611,2023 J14.1@4652,1982
  Bottom Layer w7: v1(3029,1257) 3051,1279 v1(3051,2139)
E0-DIR: J19.13 U4.21 | length 4536.1
  Top Layer w7: v1(2828,1605) 2935,1605 2950,1590 2977,1590 3003,1616 3113,1616 3145,1584 3174,1584 3209,1549 3433,1549 3454,1570 3719,1570 3748,1541 3873,1541 3889,1557 5758,1557 5805,1510 5904.67,1510 J19.13@5954.95,1560.28 ; v1(2879,660) 2900,681 2900,711 2914,725 2914,805 2959.88,850.88 U4.21@2959.88,890.35
  Bottom Layer w7: v1(2828,1605) 2826,1603 2826,1497 2819,1490 2819,1331 2881,1269 2896,1269 2911,1254 2911,1234 2871,1194 2871,765 2900,736 2900,681 v1(2879,660)
E0-EN: J20.13 J25.2 | length 2721
  Top Layer w7: v1@4204,1408 4210,1414 4522,1414 4564,1372 5283,1372 5845,810 5904.47,810 J20.13@5954.76,860.28
  Bottom Layer w7: J25.2@4152,2082 4202,2032 v1(4202,1406)
E0-STEP: J19.1 U4.51 | length 3399.2
  Top Layer w7: U4.51@3101.61,1183.65 3101.61,1214.61 3121,1234 3121,1252 v1(3155,1286) ; v1(3155,1467) 3176,1467 3180,1463 3252,1463 3281,1434 3322,1434 3338,1450 3403,1450 3432,1421 3536,1421 3555,1440 3659,1440 3688,1411 3932,1411 3948,1427 4528,1427 4570,1385 5331,1385 5806,910 5904.67,910 J19.1@5954.95,960.28
  Bottom Layer w7: v1(3155,1286) v1(3155,1467)
E0_DIAG: J6.2 J19.12 | length 3470
  Top Layer w7: v1(3462,1549) 3470,1557 3713,1557 3742,1528 3879,1528 3895,1544 5723,1544 5806.72,1460.28 J19.12@5854.95,1460.28
  Bottom Layer w7: J6.2@3350,575 3462,687 v1(3462,1549)
E0_nCS: J14.2 J19.9 | length 1962.7
  Top Layer w7: v1(4702,1497) 4710,1505 5613,1505 5807,1311 5905.67,1311 J19.9@5954.95,1360.28
  Bottom Layer w7: J14.2@4652,2082 4702,2032 v1(4702,1497)
E-REF-PWM: J19.14
EN_DRV: J15.1 J15.3 J16.3 J24.3 J25.3 U4.46 | length 2065.9
  Top Layer w7: U4.46@3161.65,1123.61 3200.61,1123.61 3218,1141 v1(3831,1141) ; J15.3@3852,2179.64 J16.3@3952,2179.64 J24.3@4052,2179.64 J25.3@4152,2179.64
  Bottom Layer w7: v1(3831,1141) 3831,1889 3832,1890 3852,1910 J15.1@3852,1982 3851,1982 3802,2031 3802,2129.64 J15.3@3852,2179.64
FAN-0: R4.1 U1.9 U4.7 | length 5318.1
  Top Layer w7: v1(2643,1029) 2683,1069 2824,1069 2832.38,1060.62 U4.7@2868.35,1060.62 ; R4.1@2663.9,1760 2663.9,1724.1 v1(2665,1723) 2673,1715 3292,1715 3316,1739 4908,1739 5791,2622 5791,2688 5820,2717 5972,2717 6005,2684 6005,2517 6218,2304 6218,2258.56 U1.9@6217.17,2257.73
  Bottom Layer w7: v1(2643,1029) 2673,1059 2673,1649 2665,1657 v1(2665,1723)
FAN-0_5V: J21.1 U1.8 | length 1587.9
  Top Layer w7: J21.1@5403.38,2360.28 5453.05,2409.95 5453.05,2526.05 5747,2820 5993,2820 6019,2794 6019,2765 6019,2523 6273,2269 6273,2230 6266.06,2223.06 U1.8@6242,2223.06
FAN-1: R6.1 U1.12 U4.18 | length 5025.1
  Top Layer w7: R6.1@2771.9,1680 v1(2802,1680) 2811,1689 3135,1689 3175,1649 3245,1649 3267,1627 3397,1627 3418,1648 3755,1648 3784,1619 3837,1619 3853,1635 5240,1635 5805,2200 5975,2200 6092,2317 6140,2317 6158.11,2298.89 U1.12@6158.11,2257.73 ; v1(2837,695) 2858,716 2858,726 2875,743 2875,826 2912.64,863.64 U4.18@2912.64,890.35
  Bottom Layer w7: v1(2802,1680) 2794,1672 2794,1503 2793,1502 2793,1319 2801,1311 2801,1213 2845,1169 2845,753 2858,740 2858,716 v1(2837,695)
FAN-1_5V: J17.14 U1.11 | length 486.2
  Top Layer w7: J17.14@5854.95,2260.28 5892.72,2260.28 5940,2213 5969,2213 6087,2331 ; 6128,2331 6087,2331 ; U1.11@6176,2257.73 6176,2301 6146,2331 6087,2331
FAN-2_5V: R2.1 U2.11 | length 818.1
  Top Layer w7: R2.1@418,2180.57 418,2086 662,1842 898.2,1842 951.2,1789 U2.11@951.2,1721.73
FAN-3_5V: R7.1 U2.6 | length 694.8
  Top Layer w7: R7.1@504,1422.43 559.57,1422.43 609,1373 935,1373 990.57,1428.57 U2.6@990.57,1593.33
FET-0_5V: R12.1 U2.8 | length 1847.7
  Top Layer w7: U2.8@1015.4,1687.06 v1(1052,1687.06) ; v1(1094,505) R12.1@517,505 ; R12.1@517,505 511.43,499.43 R12.1@502,499.43 507.57,505 R12.1@517,505
  Bottom Layer w7: v1(1052,1687.06) 1094,1645.06 v1(1094,505)
GND: C1.1 C2.1 C3.1 C4.2 C5.1 C6.1 C7.1 C8.2 C9.1 C10.2 C11.2 C12.2 C13.2 C14.2 C15.1 C16.1 C17.1 C18.2 C19.2 C20.1 C21.1 C22.1 C23.2 H1.1 H2.1 H3.1 H4.1 J5.4 J18.11 J18.12 J18.13 J18.14 J21.13 J21.14 J22.1 J22.2 J29.2 J33.3 J33.5 J33.9 Q1.1 Q1.2 Q1.3 Q2.1 Q2.2 Q2.3 Q3.1 Q3.2 Q3.3 R3.2 R4.2 R6.2 R8.2 R9.2 R11.2 R13.2 R14.2 R17.1 R21.2 SW1.1 SW1.2 TH4.1 TH5.1 U1.1 U1.4 U1.7 U1.10 U1.13 U2.4 U2.7 U2.10 U2.13 U3.1 U4.13 U4.29 U4.53 U4.65 V1.2 V2.2 | length 3182.4
  Top Layer w7.87: U4.13@2868.35,966.13 U4.65@2902.87,966.13 ; U4.65@3070.12,1151.88 U4.53@3070.12,1183.65 ; U4.29@3085.87,890.35 U4.65@3085.87,931.87
  Top Layer w10: C1.1@806,1631.23 C1.1@809.23,1628 ; R9.2@872,1773 883.14,1761.86 v1(908.83,1761.86) ; v1(882,1475) R14.2@882,1504 ; U2.13@911.83,1721.73 v1@911.83,1758.86 ; U2.4@951.2,1593.33 951.2,1556.2 v1(954.2,1553.2) ; v1(954,1430) R11.2@954,1459 ; U2.10@970.89,1721.73 970.89,1768.89 v1(997,1795) 1018.1,1795 R13.2@1034,1810.9 ; U2.7@1015.4,1628 v1(1052,1628) ; v1(2532,973) R21.2@2532,1001 ; v1(2626,1723) R4.2@2626,1760 ; v1(2707,1679) 2733,1679 R6.2@2734,1680 ; R8.2@6059,2105 v1(6059,2134) ; C2.1@6059,2167.23 6062.23,2164 U1.1@6113.6,2164 ; U1.13@6138.43,2257.73 v1@6138.43,2294.57 ; U1.4@6177.8,2129.33 v1(6177.8,2095.2) 6178,2095 R3.2@6178,2061 ; U1.10@6197.49,2257.73 v1(6197.49,2294.51) ; U1.7@6242,2164 v1(6280,2164)
  Top Layer w20: v1(268,378) Q3.1@268,428.61 ; v1(268,1301) Q2.1@268,1351.61 ; v1(268,2276) Q1.1@268,2326.61 ; v1(318,378) Q3.2@318,428.61 ; v1(318,1301) Q2.2@318,1351.61 ; v1(318,2276) Q1.2@318,2326.61 ; v1(368,378) Q3.3@368,428.61 ; v1(368,1301) Q2.3@368,1351.61 ; v1(368,2276) Q1.3@368,2326.61 ; v1(806,1598) C1.1@806,1631.23 ; SW1.1@1155.69,1378.29 SW1.2@1155.69,1539.71 ; v2(2239.15,1417.15) C23.2@2273,1417.15 ; J33.9@2370.08,1261 2273,1261 2273,1361 ; J33.5@2370.08,1361 2273,1361 ; J33.3@2370.08,1411 2279.15,1411 C23.2@2273,1417.15 ; v2(2709,1029) C18.2@2742,1029 ; C22.1@2709.85,1204 2709.85,1167.15 v2(2711,1166) C8.2@2743,1166 ; v2(2710,781) 2733.3,781 C21.1@2738.3,776 ; v2@2713,977 C20.1@2742.3,977 ; C5.1@2844,1308.7 v2(2844,1340.7) ; v2(2848,508) V2.2@2879.25,508 ; C14.2@2886,1309 v2(2886,1341) ; V1.2@3038.5,508 v2(3069.75,508) ; v2(3056,554) 3056.3,554.3 C15.1@3056.3,628 ; C10.2@3073,777.3 3073,747 v2(3076,744) ; C6.1@3093.7,711 3093.7,669.15 C4.2@3093.85,669 ; C17.1@3121,777 3146,752 v2(3146,751) ; C12.2@3162,784 3163,783 v2(3235,783) ; v2(3186.3,710.7) C3.1@3186.3,743 ; C19.2@3287,1117 v2@3319,1117 ; v1(6059,2134) C2.1@6059,2167.23 ; 2273,1361 C23.2@2273,1417.15 ; 3333,293 v2(3333,309) v2(3374,309.05) v2(3374,309.05) 3374,293.47 ; 3333,293 C16.1@3333,277.85 C16.1@3333,277.85 R17.1@3374,277.9 3374,293.47 ; 3333,293 3333.47,293.47 3374,293.47
  Top Layer w25: 3097,690 v2(3126,690)
  Top Layer w30: C7.1@5092,1096.77 v2(5092,1133) ; C9.1@5091,880.23 5091.23,880 v2(5133,880) 5114,861 v2(5114,843) ; C9.1@5091,880.23 5091,866 v2(5114,843) ; C9.1@5091,880.23 5073.22,862.45 U3.1@5008.05,862.45 5016.5,854 5062,854 v2(5073,843) v2(5114,843)
  other v1: 3253,50 5627,55 2750,56 5006,58 831,59 4298,60 1821,62 3776,62 65,63 1391,64 2284,64 6192,106 4608,165 907,181 2281,182 1817,183 1388,188 4638,306 4251,307 4815,325.76 3894,352 5547,360 4870.06,385 5643,422 4917,435 4766,436 862,461 609,462 4807,484 4967,484 3713.22,499 4674,521 3299,533 3499,533 5019,535 4843,536 5642,537 4889.38,584 5068,584 2923,585 6203,598 3933,618 4668,619 4132,626 2817,627 4332,627 4532,627 4938,635 5122,635 5642,638 5169,685 4987,686 2741,700 59,703 610,709 3430.07,778 3948,802 5463,813 5657,823 4516,838 883,860 2138,871 1519,881 5682,897 6199,1019 615,1176 4675,1176 62,1177 4386,1223 3689,1227 3598,1230 3533,1232 3771,1237 3869,1248 858,1300.5 3205,1359 6201,1458 620,1472 5700,1598 5599,1605 5510,1617 53,1629 5412,1636 2365,1654 1618,1664 5901,1723 1620,1739 2369,1743 5088,1747 693,1880 4780,1905 5901,1912 3877,1927 3973,1927 4076,1927 4175,1927 3803,1928 4474,1928 4376,1929 4576,1929 4676,1929 4254,1940 3173,1954 2925,1955 3513,1959 6196,1966 614,1978 4246,2082 2922,2083 3649,2083 53,2124 4502,2157 3186,2182 608,2194 4002,2206 3644,2218.15 5115,2241 5594,2266 6132.43,2294.57 891,2309 6124,2361 608,2408 4513,2440 1720,2485 6197,2488 5137,2521 5646,2575 2606,2617 3541,2620 5490,2632 612,2654 54,2725 5588,2759 604,2800 5135,2811 6242,3144 5951,3172 583,3178 4047,3180 5494,3181 4496,3182 5019,3182 1069,3183 2774,3183 3568,3183 59,3185 2079,3185 3166,3186 1575,3188
  other v2: 2709,977 3319,1116.13
  other v3: 2906.73,928.73 3123.27,928.73 2993.35,972.04 3036.65,972.04 2950.04,1015.35 2993.35,1015.35 3036.65,1015.35 3079.96,1015.35 2950.04,1058.65 2993.35,1058.65 3036.65,1058.65 3079.96,1058.65 2993.35,1101.96 3036.65,1101.96 2906.73,1145.27 3123.27,1145.27
HEAT-0: R3.1 U1.5 U4.23 | length 6646.5
  Top Layer w7: v1(2879,600) 2913,634 2913,656 2927,670 2927,700 2940,713 2940,791 2991.38,842.38 U4.23@2991.38,890.35 ; v1(2960,1872) 3742,1872 3756,1858 4821,1858 5208,2245 5208,2759 5253,2804 5324,2804 5353,2775 5353,2752 5390,2715 5600,2715 5805,2920 6004,2920 6047,2877 6047,2535 6316,2266 6316,2126 6272,2082 6224,2082 ; U1.5@6197.49,2129.33 6197.49,2108.51 6224,2082 ; R3.1@6215.9,2061 6224,2069.1 6224,2082
  Bottom Layer w7: v1(2879,600) 2930,651 2930,1076 2939,1085 2939,1288 2927,1300 2927,1329 2938,1340 2938,1850 v1(2960,1872)
HEAT-0_5V: J21.10 U1.6 | length 1815.5
  Top Layer w7: J21.10@5303.38,2760.28 5343.66,2720 5365,2720 5384,2701 5608,2701 5808,2901 5986,2901 6033,2854 6033,2771 6033,2529 6302,2260 6302,2132 6266,2096 6230,2096 6217.17,2108.83 U1.6@6217.17,2129.33
MISO: J2.1 J4.1 J8.1 J10.1 J21.7 U4.43 | length 5264
  Top Layer w7: U4.43@3161.65,1076.37 3197.77,1076.37 3206.14,1068 v1(3733,1068) ; v1@3733,1850 3739,1844 4827,1844 5222,2239 5222,2678 5245,2701 5362.66,2701 J21.7@5403.38,2660.28
  Bottom Layer w7: v1(3734,1851) 3733,1850 v1(3733,1068) 3733,518 3831,420 3924,420 J2.1@3981,477 4038,420 4124,420 J4.1@4181,477 4238,420 4324,420 J8.1@4381,477 4438,420 4524,420 J10.1@4581,477
MISO_E: J10.2 J22.9 | length 898.1
  Top Layer w7: J10.2@4581,577 4772,577 4905,710 5310,710 5359.72,660.28 J22.9@5403.38,660.28
MISO_X: J2.2 J22.3 | length 1620.7
  Top Layer w7: J2.2@3981,577 4031,527 4031,428 4110,349 4664,349 4725,410 5353.66,410 J22.3@5403.38,360.28
MISO_Y: J4.2 J22.5 | length 1438.7
  Top Layer w7: J4.2@4181,577 4231,527 4231,427 4281,377 4652,377 4784,509 5354.66,509 J22.5@5403.38,460.28
MISO_Z: J8.2 J22.7 | length 1256.9
  Top Layer w7: J8.2@4381,577 4431,527 4431,427 4453,405 4640,405 4844,609 5354.66,609 J22.7@5403.38,560.28
MNTA: U1.15
  other v1: 6156.15,2171.87 6199.45,2171.87 6156.15,2215.18 6199.45,2215.18
MNTB: U2.15
  other v1: 929.55,1635.87 972.85,1635.87 929.55,1679.18 972.85,1679.18
MOSI: FB8.2 J1.1 J3.1 J7.1 J9.1 U4.42 | length 4819.8
  Top Layer w7: U4.42@3161.65,1060.62 3193.72,1060.62 3200.34,1054 3716,1054 3723,1047 v1(3805,1047) ; v1(3810,1679) 3818,1687 5123,1687 5725,2289 FB8.2@5725,2329
  Bottom Layer w7: v1(3810,1679) 3810,1075 3805,1070 v1(3805,1047) 3805,553 J1.1@3881,477 3932,528 4030,528 J3.1@4081,477 4133,529 4229,529 J7.1@4281,477 4332,528 4430,528 J9.1@4481,477
MOSI_E: J9.2 J22.10 | length 1045.2
  Top Layer w7: J9.2@4481,577 4531,527 4531,429 4541,419 4634,419 4875.28,660.28 J22.10@5303.38,660.28
MOSI_X: J1.2 J22.4 | length 1591.7
  Top Layer w7: J1.2@3881,577 3931,527 3931,427 4023,335 4670,335 4695.28,360.28 J22.4@5303.38,360.28
MOSI_Y: J3.2 J22.6 | length 1409.9
  Top Layer w7: J3.2@4081,577 4131,527 4131,427 4195,363 4658,363 4755.28,460.28 J22.6@5303.38,460.28
MOSI_Z: J7.2 J22.8 | length 1228.1
  Top Layer w7: J7.2@4281,577 4331,527 4331,427 4367,391 4646,391 4815.28,560.28 J22.8@5303.38,560.28
nAC_FAULT: J18.8
NetC9_2: C9.2 J34.2 U3.2 U3.TAB | length 460.9
  Top Layer w35: U3.2@5008.05,953 5071.77,953 C9.2@5087.39,937.39
  Top Layer w40: U3.TAB@4763.95,953 U3.2@5008.05,953
  Top Layer w60: J34.2@4655,899.79 4710.74,899.79 U3.TAB@4763.95,953
  other v2: 4735,860 4797,860.28 4830,894 4830,953 4830,1012 4735,1046 4796,1046
NetC16_2: C16.2 J5.5 J5.6 R17.2 | length 166.8
  Top Layer w25: J5.6@3207.22,240 R17.2@3374,240
NetD1_A: D1.A R1.1 | length 58.9
  Top Layer w15: R1.1@56,2341.75 D1.A@56,2400.66
NetD1_C: D1.C D2.A J26.2 Q1.TAB | length 544
  Top Layer w15: D1.C@56,2484 343,2484 Q1.TAB@343,2471
  Top Layer w50: Q1.TAB@343,2471 Q1.TAB@347,2471 ; Q1.TAB@347,2492 J26.2@347,2732
  other v1: 263,2412 303,2412 343,2412 383,2412 423,2412 263,2452 303,2452 343,2452 383,2452 423,2452 263,2492 303,2492 343,2492 383,2492 423,2492 263,2532 303,2532 343,2532 383,2532 423,2532
NetD3_A: D3.A R5.1 | length 58.9
  Top Layer w15: R5.1@56,1366.75 D3.A@56,1425.66
NetD3_C: D3.C D4.A J27.2 Q2.TAB | length 580
  Top Layer w15: D3.C@56,1509 164,1509 D4.A@164,1525 180,1509 330,1509 Q2.TAB@343,1496
  Top Layer w50: Q2.TAB@343,1496 347,1496 J27.2@347,1757
  other v1: 263,1437 303,1437 343,1437 383,1437 423,1437 263,1477 303,1477 343,1477 383,1477 423,1477 263,1517 303,1517 343,1517 383,1517 423,1517 263,1557 303,1557 343,1557 383,1557 423,1557
NetD5_A: D5.A R10.1 | length 58.9
  Top Layer w15: R10.1@56,443.75 D5.A@56,502.66
NetD5_C: D5.C D6.A J28.2 Q3.TAB | length 570.6
  Top Layer w15: D5.C@56,586 148,586 D6.A@164,602 182,584 332,584 Q3.TAB@343,573
  Top Layer w50: Q3.TAB@343,573 347,573 J28.2@347,834
  other v1: 263,514 303,514 343,514 383,514 423,514 263,554 303,554 343,554 383,554 423,554 263,594 303,594 343,594 383,594 423,594 263,634 303,634 343,634 383,634 423,634
NetD7_A: D7.A R23.2 | length 73.6
  Top Layer w10: D7.A@731,1411.34 D7.A@730.66,1411 730.66,1483.66 R23.2@731,1484
NetD7_C: D7.C U2.3 | length 251.6
  Top Layer w7: D7.C@814,1411 847,1411 912,1476 912,1524 933,1545 933,1591.84 U2.3@931.51,1593.33
NetFB8_1: FB8.1 J18.6 | length 247.6
  Top Layer w7: FB8.1@5725,2366.9 5725,2431 5776,2482 5776.67,2482 J18.6@5854.95,2560.28
NetFB18_1: FB18.1 J18.4 | length 130.2
  Top Layer w7: FB18.1@5766,2366.9 5854.95,2455.85 J18.4@5854.95,2460.28
NetJ5_1: J5.1
NetJ16_1: J16.1
NetJ24_1: J24.1
NetJ25_1: J25.1
NetJ33_7: J33.7
NetJ33_8: J33.8
NetQ1_4: Q1.4 R2.2 | length 75.2
  Top Layer w7: R2.2@418,2251.43 Q1.4@418,2326.61
NetQ2_4: Q2.4 R7.2 | length 86
  Top Layer w7: Q2.4@418,1351.61 R7.2@504,1351.57 R7.2@504,1351.57
NetQ3_4: Q3.4 R12.2 | length 84
  Top Layer w7: Q3.4@418,428.61 R12.2@502,428.57 R12.2@502,428.57
NetR9_1: R9.1 TP4.1 U2.12 | length 185.3
  Top Layer w7: TP4.1@815,1807 815,1810.9 R9.1@872,1810.9 890.1,1810.9 909,1792 931.51,1769.49 U2.12@931.51,1721.73
NetR11_1: R11.1 TP5.1 U2.5 | length 210
  Top Layer w7: TP5.1@905,1414 905,1447.9 R11.1@954,1496.9 954,1524 975,1545 975,1561 970.89,1565.11 U2.5@970.89,1593.33
NetR13_1: R13.1 TP6.1 U2.9 | length 175.8
  Top Layer w7: U2.9@990.57,1721.73 990.57,1747.57 1016,1773 R13.1@1034,1773 TP6.1@1130,1773